# Altium PCB NanoEEG_v2_MCU.PcbDoc (part 1 of 2)
Units mil, origin at the board's own origin, x right, y up, seen from the top; angles counter-clockwise.
Board outline 2598.43 x 2047.24 mil, 4 copper layers (Top Layer, Gound Plane 1, Power Layer 1, Bottom Layer), stack 73.627 mil thick; 74 components, 82 nets, 371 pads, 188 vias.
Unrouted connection lines stored in the file: 22.
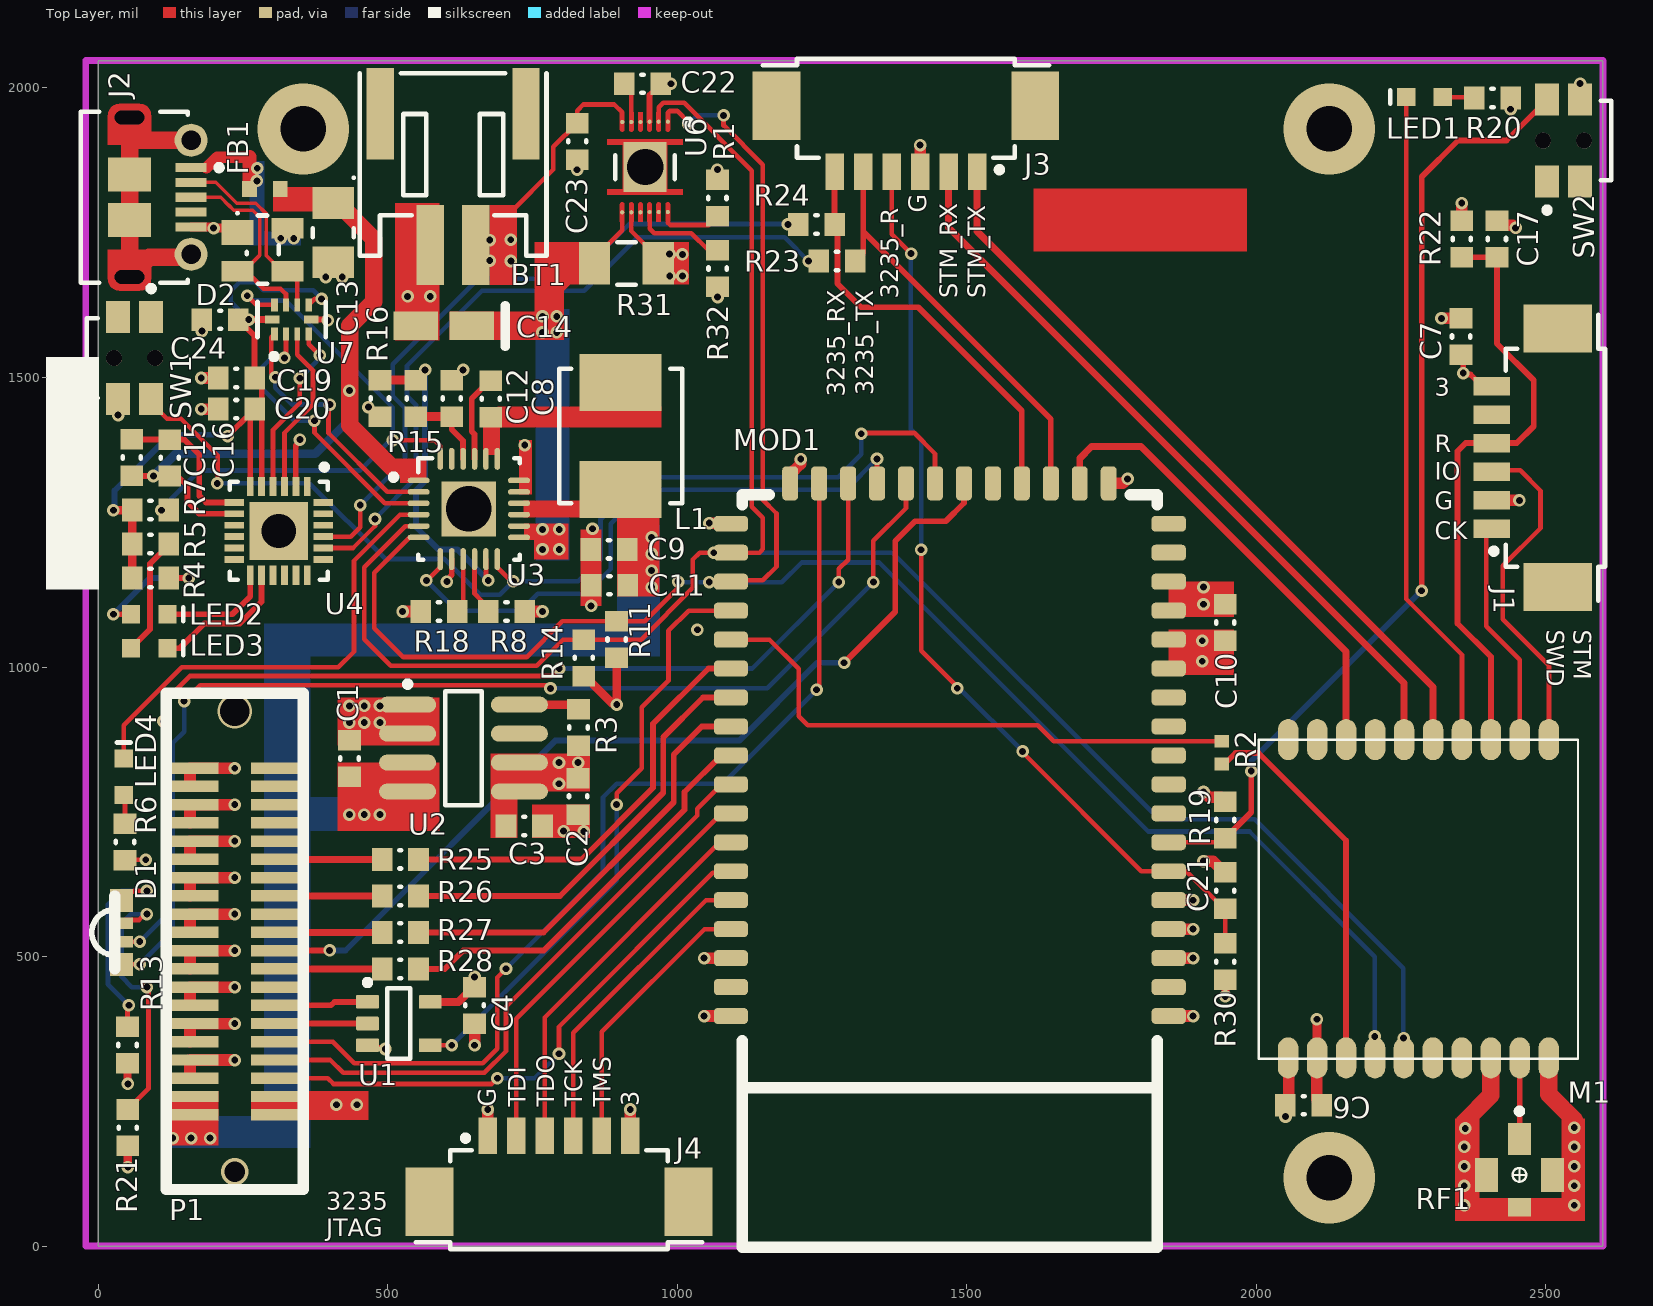
[diagram p0: Top Layer view]
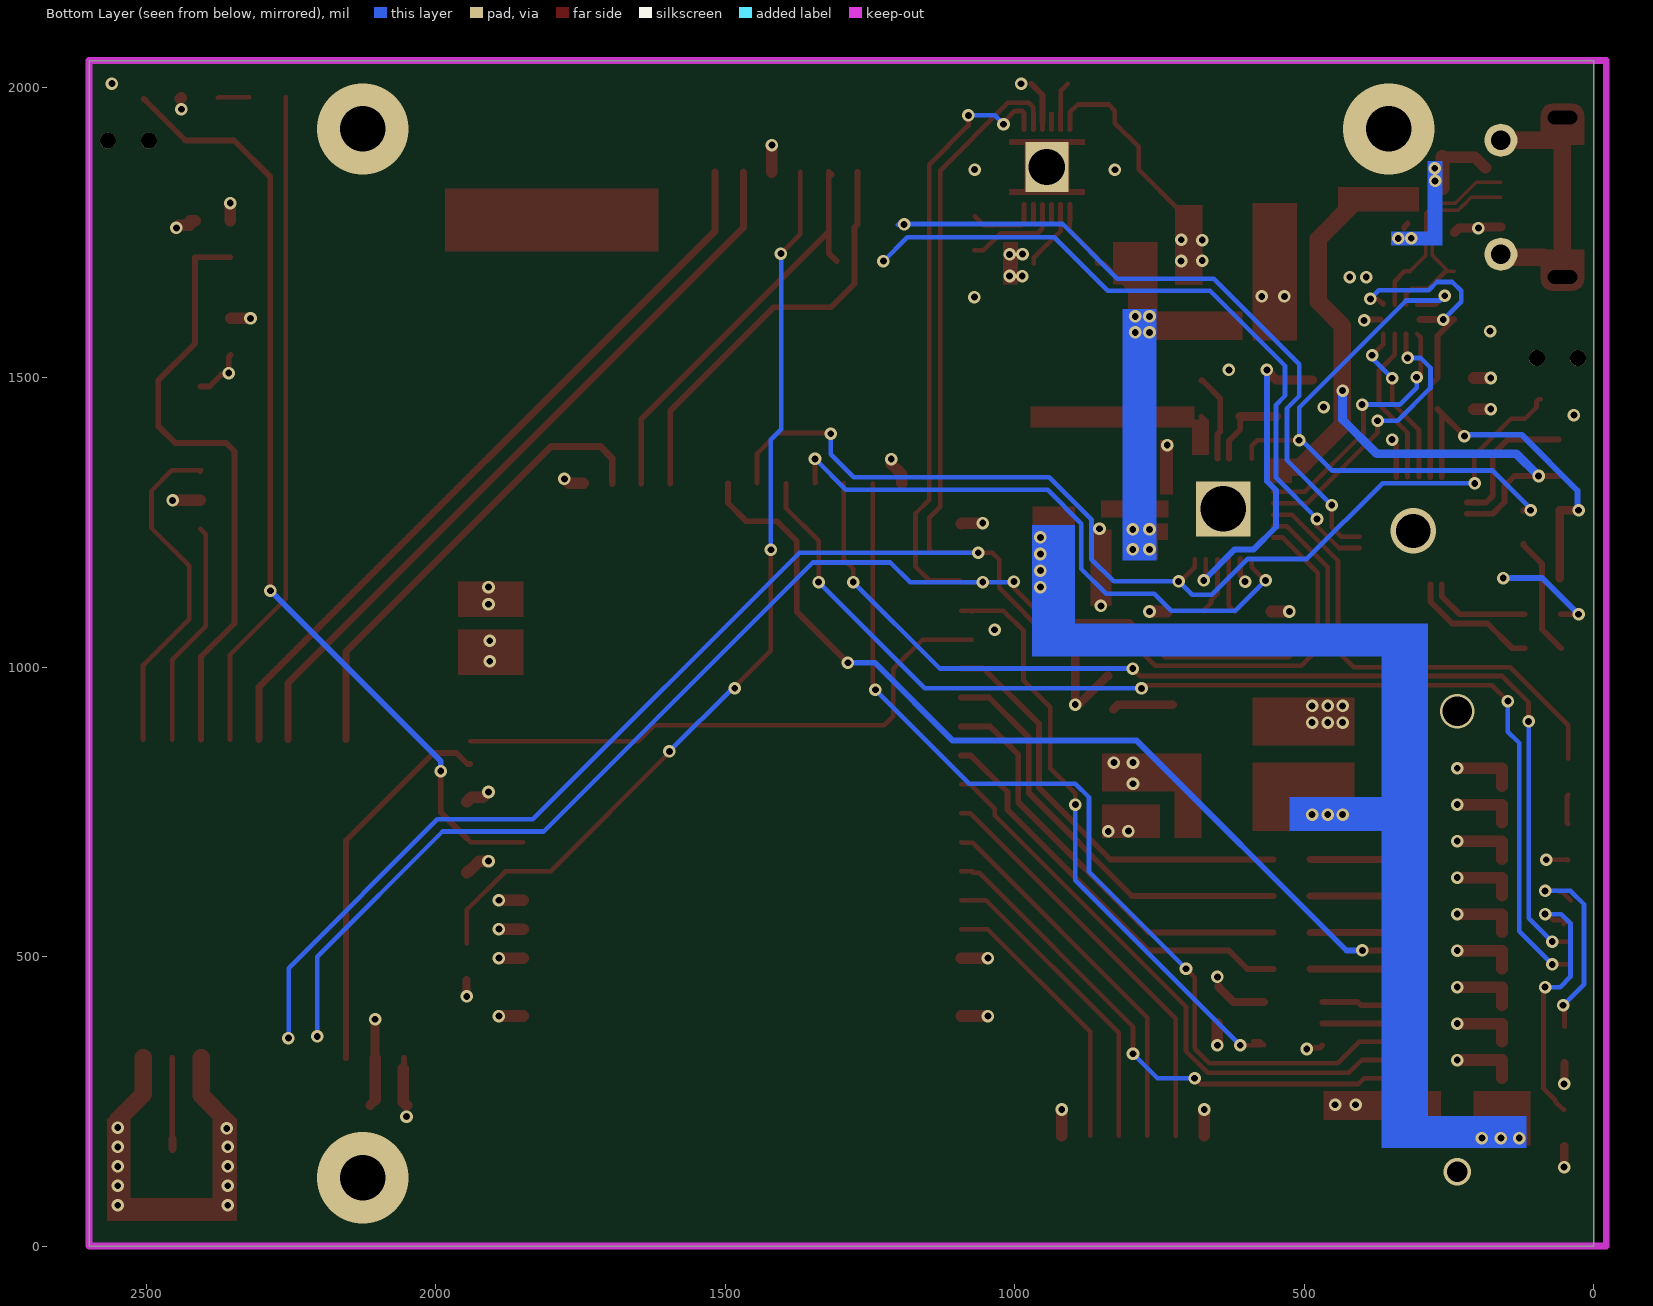
[diagram p1: Bottom Layer view, seen from below]
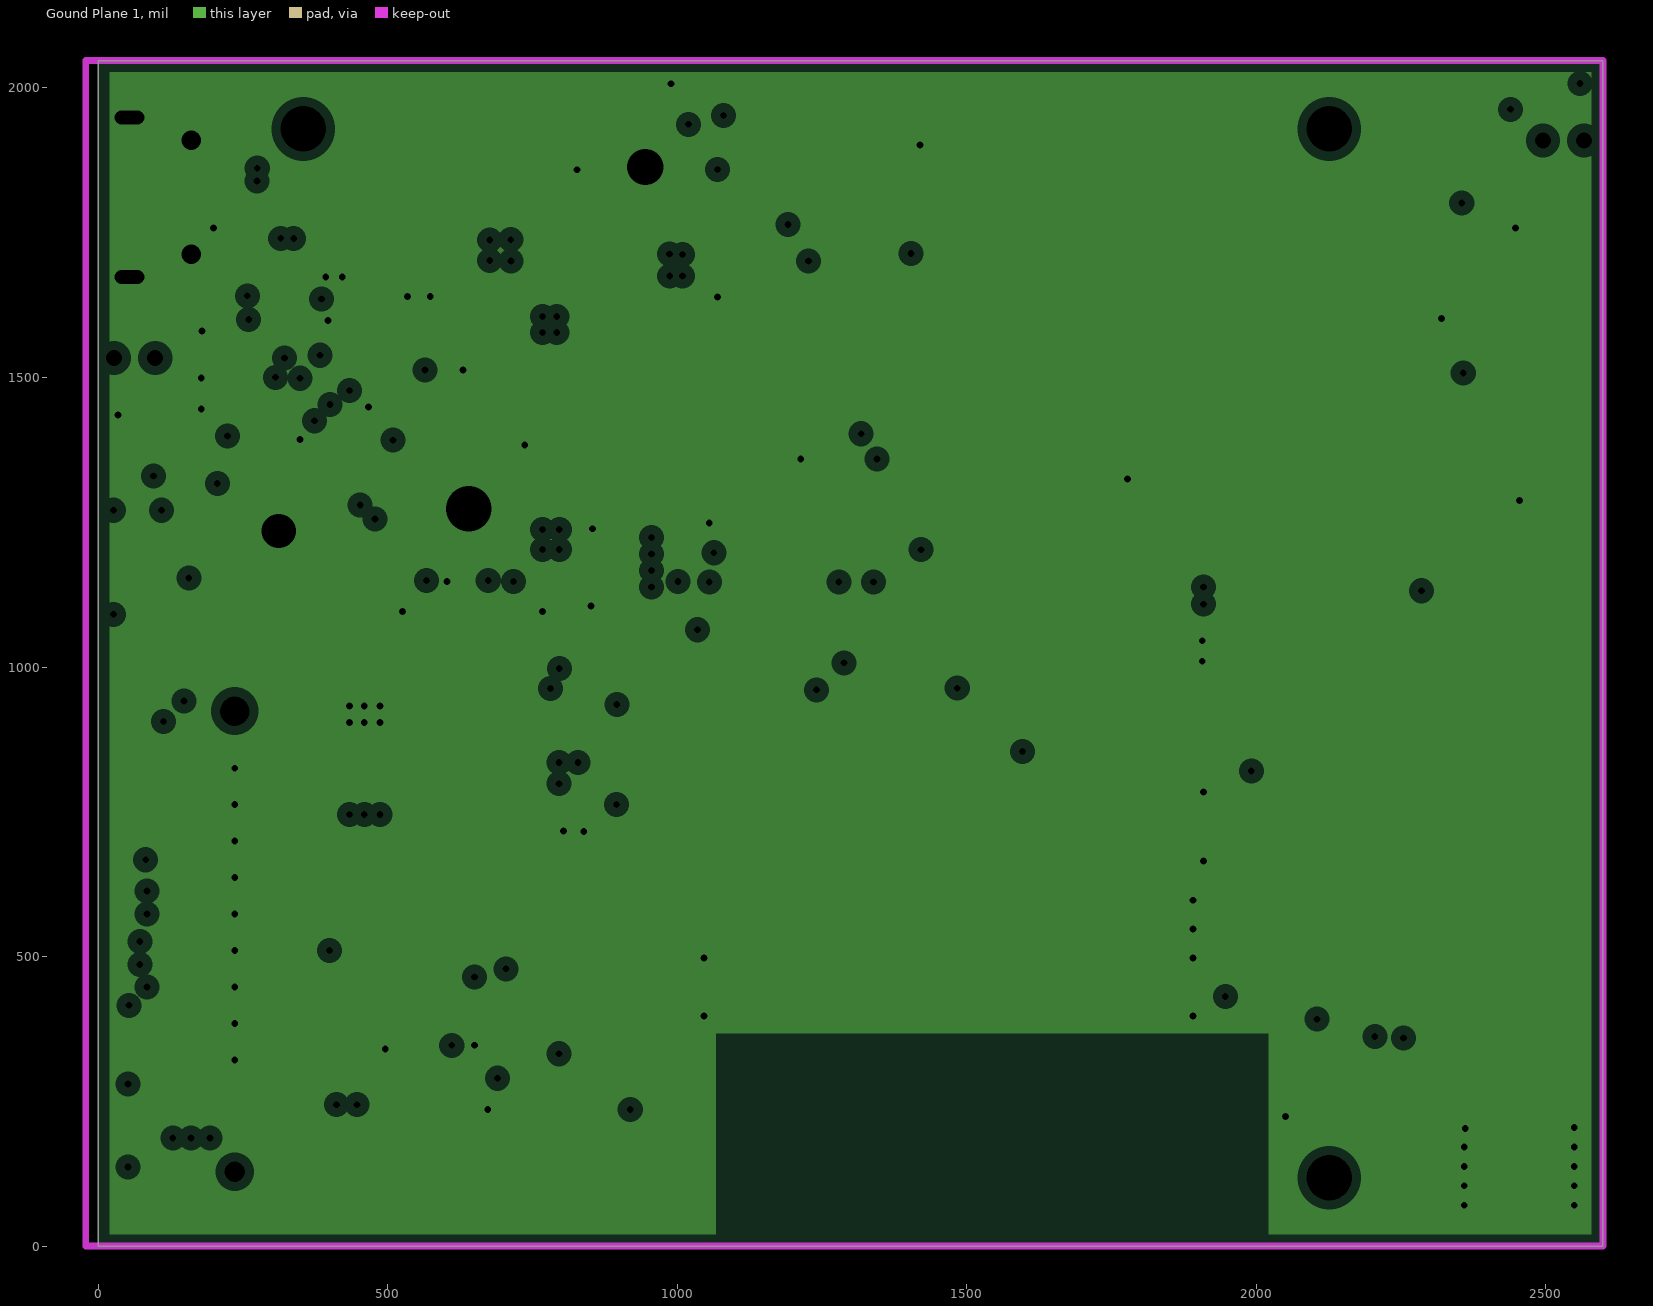
[diagram p2: Gound Plane 1, clearances drawn from the general rule]
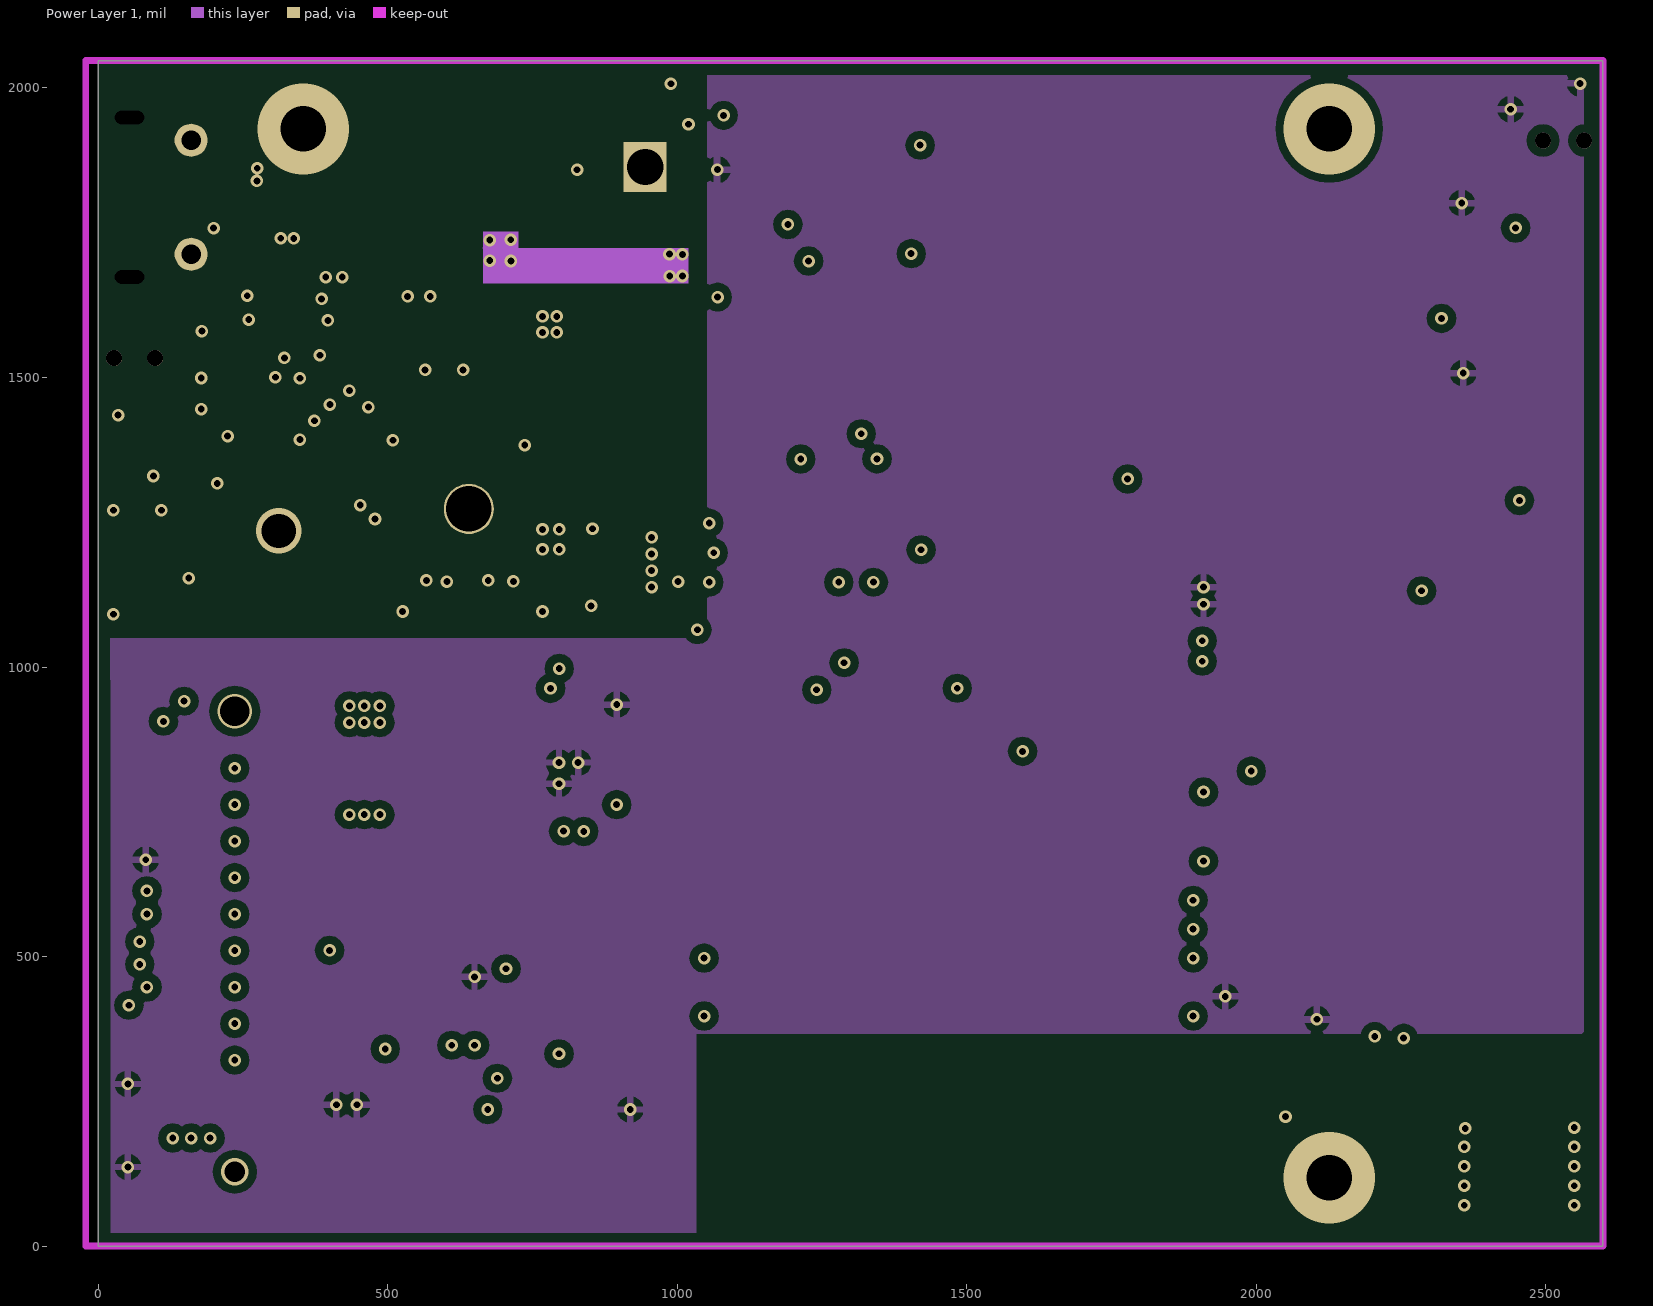
[diagram p3: Power Layer 1]

## Layer stack, top to bottom
Top Solder: solder mask 0.4, Solder Resist, Dk 3.5
Top Layer: signal copper 1.4
Dielectric1: core 31.4961, FR-4, Dk 4.8
Gound Plane 1: plane copper 1.4173, net GND
Dielectric 3: prepreg 5, Dk 4.2
Power Layer 1: signal copper 1.4173
Dielectric 2: core 31.4961, FR-4, Dk 4.2
Bottom Layer: signal copper 1.4
Bottom Solder: solder mask 0.4, Solder Resist, Dk 3.5

## Board outline
0,0 0,2047.24 2598.43,2047.24 2598.43,0.02

## Design rules (kind name [scope] priority, off if disabled: settings)
Clearance Clearance_1 [InPolygon] p1: gap=14 ignorepadtopadclearanceinfootprint=FALSE except(0: Arc-Hole Track-Hole SMDPad-Hole THPad-Hole Via-Hole Fill-Hole Poly-Hole Region-Hole Text-Hole)
Clearance [All] p2: gap=6 ignorepadtopadclearanceinfootprint=FALSE except(0: Arc-Hole Track-Hole SMDPad-Hole THPad-Hole Via-Hole Fill-Hole Poly-Hole Region-Hole Text-Hole)
FabricationTestPointUsage TestPointUsage [All] p1: valid=0 allowmultiple=FALSE
FabricationTestpoint Testpoint [(IsPad And (OnTopLayer Or OnBottomLayer))] p1: side=3 testpointundercomponent=TRUE minsize=40 maxsize=100 preferedsize=60 minholesize=0 maxholesize=40 preferedholesize=32 testpointgrid=1 allowsidetop=TRUE allowsidebottom=TRUE usegrid=TRUE gridtolerance=0.01
HoleSize [All] p1: absolutevalues=TRUE maxlimit=787.4 minlimit=11.81 maxpercent=80.000 minpercent=20.000
HoleToHoleClearance [All] p1: gap=0 allowstackedmicrovias=TRUE
MinimumSolderMaskSliver [All] p1: minsoldermaskwidth=0
PlaneClearance [All] p1: clearance=15.75
PlaneConnect [All] p1: planeconnectstyle=Direct reliefexpansion=11.81 reliefentries=4 reliefconductorwidth=11.81 reliefairgap=11.81
PolygonConnect [All] p1: connectstyle=Relief reliefconductorwidth=11.81 reliefentries=4 polygonreliefangle="90 Angle" airgapwidth=11.81
RoutingVias [All] p1: holewidth=19.68 width=51.18 viastyle="Through Hole" minholewidth=11.81 minwidth=19.68 maxholewidth=393.7 maxwidth=787.4
SilkToSilkClearance [All] p1: silktosilkclearance=0
SilkToSolderMaskClearance SilkscreenOverComponentPads [IsPad] p1: minsilkscreentomaskgap=0 clearancetoexposedcopper=TRUE
SolderMaskExpansion [All] p1: expansion=2 istentingtop=FALSE
Width [All] p1: maxlimit=200 minlimit=6 preferedwidth=10
21 further rules are at their usual default settings.

## Classes and differential pairs
component class NanoEEG_v3: BT1 D1 J1 J3 J4 M1 MOD1 P1 RF1 U3 U4 U6
component class NanoEEG_v2_MCU: BT1 D1 J1 J3 J4 L2 M1 MOD1 P1 R19 RF1 SW2 U3 U4 U6

## Components (designator, comment, footprint, x,y, rotation, side; value= is the part's Value field where it differs from the comment)
BT1 "Battery" PH2.0-WS-2P 613.16,1954.92 r180 top locked
C1 "CAP 10uF 6.3V" CAPC0603(1608)100_N 434.21,842.11 r270 top value=10uF
C2 "CAP 10uF 6.3V" CAPC0603(1608)100_N 829,776.74 r90 top value=10uF
C3 "CAP 100nF 6.3V" CAPC0603(1608)100_N 736,725.32 r180 top value=100nF
C4 "CAP 100nF 6.3V" CAPC0603(1608)100_N 650.17,415.86 r90 top value=100nF
C6 "CAP 100nF 6.3V" CAPC0603(1608)100_N 2081.92,243.35 r0 top value=100nF
C7 "CAP 100nF 6.3V" CAPC0603(1608)100_N 2353.74,1570.41 r270 top value=100nF
C8 "CAP 47nF" CAPC0603(1608)100_N 678.08,1463.09 r270 top value=47nF
C9 "CAP 10uF" CAPC0603(1608)100_N 882.08,1203.15 r0 top value=10uF
C10 "1uF" CAPC0603(1608)100_N 1946.54,1076.74 r90 top value=100nF
C11 "CAP 10uF" CAPC0603(1608)100_N 882.98,1141.07 r0 top value=10uF
C12 "CAP 4.7uF 10V 0603(1608)" CAPC0603(1608)55_N 610.8,1463.92 r90 top value=4.7uF
C13 "TAJA106K016RNJ" CAPMP3217X18-T_V 406.21,1750.11 r270 top
C14 "T491A106K016AT" KEMT-A-3216-18-2_N 596.97,1588.99 r180 top
C15 "CAP 100nF 6.3V" CAPC0603(1608)100_N 58.11,1361.65 r90 top value=100nF
C16 "CAP 4.7uF 6.3V" CAPC0603(1608)100_N 124.05,1361.29 r90 top value=4.7uF
C17 "CAP 1uF 25V 0603(1608)" CAPC0603(1608)100_N 2415.41,1738.93 r270 top value=1uF
C19 "CAP 100nF 6.3V" CAPC0603(1608)100_N 238.81,1499.01 r0 top value=100nF
C20 "CAP 4.7uF 6.3V" CAPC0603(1608)100_N 238.81,1445.28 r0 top value=4.7uF
C21 "CAP 1uF 25V" CAPC0603(1608)100_N 1946.54,613.71 r270 top value=1uF
C22 "CAP 470nF 10V" CAPC0603(1608)100_N 940.06,2007.04 r180 top value=470nF
C23 "CAP 1uF 10V" CAPC0603(1608)100_N 827.36,1907.74 r90 top value=1uF
C24 "CAP 100nF 6.3V" CAPC0603(1608)100_N 211,1599.75 r0 top value=100nF
D1 "Bi-Color LED" LED_Bi_Color_1204 28.6,541.66 r180 top
D2 "SP0503BAHTG" LFUS-SOT143-4_V 284.16,1720.58 r0 top
FB1 "BLM18PG600SN1J" MURA-BLM18PG_KG-CHIP-2_V2 288.16,1825.7 r180 top
J1 "Header 6" GH-1.25-WS-6P 2516.51,1361.4 r90 top locked
J2 "105017-0001" USB-MICRO-B_V 107.66,1811.13 r270 top
J3 "Header 6" GH-1.25-WS-6P 1395,1965 r180 top locked
J4 "Header 6" GH-1.25-WS-6P 796,80.3 r0 top locked
L1 "ETQ-P3M2R2YFP" FP-PCC-M0530M-MFG 902.46,1398.81 r270 top value=2.2uH
LED1 "150060BS75000" 0603_A 2290.64,1984.05 r0 top
LED2 "150060BS75000" 0603_A 88.43,1091 r180 top
LED3 "150060BS75000" 0603_A 88.43,1032.31 r180 top
LED4 "150060BS75000" 0603_A 44.67,810.61 r270 top locked
M1 "CC1310-Module (Silicontrac)" CC1310ZTR4-GC 2555.32,325.61 r180 top
MOD1 "TA3235S_UA_MOD" TA_3235S_UA_MOD 1829.07,1247.36 r180 top locked
P1 "Header 20X2" FCI-B2B-0.8mm-40p-MALE 158.86,226.89 r270 top locked
R1 "10K 1%" RESC0603(1608)_N 1069.52,1809.57 r270 top value="10000.00 Ohm"
R2 "1K 5% 0402" RESC0402(1005)_N 1940.26,852.23 r90 top value="1000.00 Ohm"
R3 "249K 1%" RESC0603(1608)_N 829.76,895.7 r270 top value="249000.00 Ohm"
R4 "1K 1%" RESC0603(1608)_N 90.4,1153.63 r180 top value="1000.00 Ohm"
R5 "1K 1%" RESC0603(1608)_N 90.4,1212.33 r180 top value="1000.00 Ohm"
R6 "1K 1%" RESC0603(1608)_N 46.63,698.05 r270 top value="1000.00 Ohm"
R7 "1K 1%" RESC0603(1608)_N 90.4,1271.02 r0 top value="1000.00 Ohm"
R8 "260" RESC0603(1608)_N 705.29,1095.87 r180 top value="10500.00 Ohm"
R11 "4K7 1% 0603(1608)" RESC0603(1608)_N 895.53,1047.36 r90 top value="4700.00 Ohm"
R13 "1K 1%" RESC0603(1608)_N 50.84,347.38 r90 top value="1000.00 Ohm"
R14 "4K7 1% 0603(1608)" RESC0603(1608)_N 838.67,1015.86 r90 top value="4700.00 Ohm"
R15 "10K" RESC0603(1608)_N 548.74,1463.92 r90 top value="10500.00 Ohm"
R16 "10K" RESC0603(1608)_N 486.68,1463.92 r270 top value="10500.00 Ohm"
R18 "10K" RESC0603(1608)_N 588.98,1095.87 r180 top value="10500.00 Ohm"
R19 "10K 1% 0603(1608)" RESC0603(1608)_N 1946.54,735.74 r270 top value="10000.00 Ohm"
R20 "1K 1%" RESC0603(1608)_N 2407.75,1982.64 r0 top value="1000.00 Ohm"
R21 "1K 1%" RESC0603(1608)_N 51.34,204.46 r90 top value="1000.00 Ohm"
R22 "10K 1% 0603(1608)" RESC0603(1608)_N 2354.81,1738.93 r90 top value="10000.00 Ohm"
R23 "Jumper" RESC0603(1608)_N 1276.21,1700.99 r180 top value="0.00 Ohm"
R24 "Jumper" RESC0603(1608)_N 1240.45,1764.12 r180 top value="0.00 Ohm"
R25 "100R 1%" RESC0603(1608)_N 521.93,667.83 r180 top value="100.00 Ohm"
R26 "100R 1%" RESC0603(1608)_N 521.93,604.74 r180 top value="100.00 Ohm"
R27 "100R 1%" RESC0603(1608)_N 521.93,541.66 r180 top value="100.00 Ohm"
R28 "100R 1%" RESC0603(1608)_N 521.93,478.57 r180 top value="100.00 Ohm"
R30 "10K 1%" RESC0603(1608)_N 1946.54,491.2 r270 top value="10000.00 Ohm"
R31 "WSLP1206R0100FEA" FP-WSLP1206-FP_1_65x1_93x-IPC_B 912.33,1696.84 r180 top
R32 "10K 1%" RESC0603(1608)_N 1069.94,1687.9 r270 top value="10000.00 Ohm"
RF1 "RECE-20369-001E-01" IPEX_MHF_I 2454.39,122.98 r180 top
SW1 "EVQ-P7D01K" FP-EVQ-P7D01K-MFG 63.25,1533.37 r270 top
SW2 "EVQ-P7D01K" FP-EVQ-P7D01K-MFG 2530.6,1909.06 r90 top
U1 "SN74AHC1G32DBVR" DBV0005A_N 519.48,384.37 r0 top
U2 "TPS76833QDG4" TI-D8_M 631.12,860.03 r0 top
U3 "BQ25895RTWR" RTW0024H 640.33,1272.92 r0 top value=Value
U4 "CP2102N-A01-GQFN24" SLAB-QFN-24-2550X2550TP_A_V 312.1,1235 r270 top
U6 "BQ27441DRZR-G1A" FP-DRZ0012A-MFG_M 944.53,1863.35 r180 top
U7 "TS3USB3000RSER" FP-TS3USB3000RSER-MFG 334.43,1600.12 r90 top

## Footprints (in the part's own frame and the unit in brackets; to place one, negate y for a bottom-side part, rotate by r counter-clockwise, add the part's x,y. Pads: shape width x height; smd on the part's side, far side on the other; paste and mask are expansions set on the pad)
0603_A [mm] "Chip LED, 2-Leads, Body 1.6x0.8mm, IPC Medium Density"
  rect 0.8x0.8 smd: 1(-0.8,0) 2(0.8,0)
  silkscreen extent -1.5,-0.3 -1.5,0.3, body extent -0.8,-0.4 0.8,0.4, height 0.7
CAPC0603(1608)55_N [mm] "Chip Capacitor, Body 1.6x0.8mm, Height 0.55mm, IPC Medium Density"
  rect 0.9x1 smd: 1(-0.8,0) 2(0.8,0)
  silkscreen extent -0.05,-0.4 0.05,0.4, body extent -0.87,-0.48 0.88,0.47, height 0.55
CAPC0603(1608)100_N [mm] "Chip Capacitor, Body 1.6x0.8mm, Height 1.0mm, IPC Medium Density"
  rect 0.9x1 smd: 1(-0.8,0) 2(0.8,0)
  silkscreen extent -0.05,-0.4 0.05,0.4, body extent -0.87,-0.48 0.88,0.47, height 1
CAPMP3217X18-T_V [mm] "Molded Capacitor, 2-Leads, Body 3.40x1.8mm"
  rect 1.4x1.8 smd: 1(-1.3,0) 2(1.3,0)
  silkscreen extent -2.45,-0.9 0.2,0.95, body extent -1.92,-0.9 1.92,0.9, height 1.8
CC1310ZTR4-GC [mm]
  oval 0.9x1.8 smd: 1(1.27,-13.945) 2(2.544,-13.945) 3(3.814,-13.945) 4(5.084,-13.945) 5(6.354,-13.945) 6(7.624,-13.945) 7(8.894,-13.945) 8(10.164,-13.945) 9(11.434,-13.945) 10(12.704,-13.945) 11(12.708,0.015) 12(11.438,0.015) 13(10.168,0.015) 14(8.898,0.015) 15(7.628,0.015) 16(6.358,0.015) 17(5.088,0.015) 18(3.818,0.015) 19(2.548,0.015) 20(1.28,0.015)
  silkscreen extent 0,-13.94 14,0.06
DBV0005A_N [mm] "SOT23, 5-Leads, Body 3.05x1.75mm, Pitch 0.95mm, IPC Medium Density"
  rrect17% 1x0.6 smd: 1(-1.375,0.95) 2(-1.375,0) 3(-1.375,-0.95) 4(1.375,-0.95) 5(1.375,0.95)
  silkscreen extent -1.5,-1.55 0.5,1.92, body extent -1.42,-1.46 1.42,1.46, height 1.08
FCI-B2B-0.8mm-40p-MALE [mm]
  rect 0.5x2.5 smd: 1(0,0) 1(0,0) 2(0,3.93) 2(0,3.93) 3(-0.8,0) 4(-0.8,3.93) 5(-1.6,0) 6(-1.6,3.93) 7(-2.4,0) 8(-2.4,3.93) 9(-3.2,0) 10(-3.2,3.93) 11(-4,0) 12(-4,3.93) 13(-4.8,0) 14(-4.8,3.93) 15(-5.6,0) 16(-5.6,3.93) 17(-6.4,0) 18(-6.4,3.93) 19(-7.2,0) 20(-7.2,3.93) 21(-8,0) 22(-8,3.93) 23(-8.8,0) 24(-8.8,3.93) 25(-9.6,0) 26(-9.6,3.93) 27(-10.4,0) 28(-10.4,3.93) 29(-11.2,0) 30(-11.2,3.93) 31(-12,0) 32(-12,3.93) 33(-12.8,0) 34(-12.8,3.93) 35(-13.6,0) 36(-13.6,3.93) 37(-14.4,0) 38(-14.4,3.93) 39(-15.2,0) 40(-15.2,3.93)
  silkscreen extent -18.48,-1.03 3.28,4.96, body extent -18.5,-1.03 3.3,4.96, height 5.6
FP-DRZ0012A-MFG_M [mm]
  round 0.18 smd paste-1000 mask+0: 1(-1,-1.985) 2(-0.6,-1.985) 3(-0.2,-1.985) 4(0.2,-1.975) 5(0.6,-1.975) 6(1,-1.975) 7(1,1.985) 8(0.6,1.985) 9(0.2,1.985) 10(-0.2,1.975) 11(-0.6,1.975) 12(-1,1.975)
  rect 1.9x2.2 hole 1.6 paste-1000 mask+0: 13(0,0)
  Top Layer region: -1.1,-2.4 -1.1,-1.65 -1.092,-1.612 -1.071,-1.579 -1.038,-1.558 -1,-1.55 -1,-1.55 -0.962,-1.558 -0.929,-1.579 -0.908,-1.612 -0.9,-1.65 -0.9,-1.65 -0.9,-2.4
  Top Layer region: -0.7,-2.4 -0.7,-1.65 -0.692,-1.612 -0.671,-1.579 -0.638,-1.558 -0.6,-1.55 -0.6,-1.55 -0.562,-1.558 -0.529,-1.579 -0.508,-1.612 -0.5,-1.65 -0.5,-1.65 -0.5,-2.4
  Top Layer region: -0.3,-2.4 -0.3,-1.65 -0.292,-1.612 -0.271,-1.579 -0.238,-1.558 -0.2,-1.55 -0.2,-1.55 -0.162,-1.558 -0.129,-1.579 -0.108,-1.612 -0.1,-1.65 -0.1,-1.65 -0.1,-2.4
  Top Layer region: 0.1,-2.4 0.1,-1.65 0.108,-1.612 0.129,-1.579 0.162,-1.558 0.2,-1.55 0.2,-1.55 0.238,-1.558 0.271,-1.579 0.292,-1.612 0.3,-1.65 0.3,-1.65 0.3,-2.4
  Top Layer region: 0.5,-2.4 0.5,-1.65 0.508,-1.612 0.529,-1.579 0.562,-1.558 0.6,-1.55 0.6,-1.55 0.638,-1.558 0.671,-1.579 0.692,-1.612 0.7,-1.65 0.7,-1.65 0.7,-2.4
  Top Layer region: 0.9,-2.4 0.9,-1.65 0.908,-1.612 0.929,-1.579 0.962,-1.558 1,-1.55 1,-1.55 1.038,-1.558 1.071,-1.579 1.092,-1.612 1.1,-1.65 1.1,-1.65 1.1,-2.4
  Top Layer region: 1.1,2.4 1.1,1.65 1.087,1.6 1.05,1.563 1,1.55 1,1.55 0.962,1.558 0.929,1.579 0.908,1.612 0.9,1.65 0.9,1.65 0.9,2.4
  Top Layer region: 0.7,2.4 0.7,1.65 0.692,1.612 0.671,1.579 0.638,1.558 0.6,1.55 0.6,1.55 0.562,1.558 0.529,1.579 0.508,1.612 0.5,1.65 0.5,1.65 0.5,2.4
  Top Layer region: 0.3,2.4 0.3,1.65 0.292,1.612 0.271,1.579 0.238,1.558 0.2,1.55 0.2,1.55 0.162,1.558 0.129,1.579 0.108,1.612 0.1,1.65 0.1,1.65 0.1,2.4
  Top Layer region: -0.1,2.4 -0.1,1.65 -0.108,1.612 -0.129,1.579 -0.162,1.558 -0.2,1.55 -0.2,1.55 -0.238,1.558 -0.271,1.579 -0.292,1.612 -0.3,1.65 -0.3,1.65 -0.3,2.4
  Top Layer region: -0.5,2.4 -0.5,1.65 -0.508,1.612 -0.529,1.579 -0.562,1.558 -0.6,1.55 -0.6,1.55 -0.638,1.558 -0.671,1.579 -0.692,1.612 -0.7,1.65 -0.7,1.65 -0.7,2.4
  Top Layer region: -0.9,2.4 -0.9,1.65 -0.908,1.612 -0.929,1.579 -0.962,1.558 -1,1.55 -1,1.55 -1.038,1.558 -1.071,1.579 -1.092,1.612 -1.1,1.65 -1.1,1.65 -1.1,2.4
  Top Layer region: -1.65,1.225 1.65,1.225 1.65,0.975 0.975,0.975 0.975,-0.975 1.65,-0.975 1.65,-1.225 -1.65,-1.225 -1.65,-0.975 -0.975,-0.975 -0.975,0.975 -1.65,0.975 -1.65,1.225
  silkscreen extent -2.02,-2.1 1.3,0.53, body extent -1.75,-2.5 1.75,2.5, height 0.25
FP-EVQ-P7D01K-MFG [mm]
  rect 1.4x1.05 smd paste+0 mask+0: 1(-1.8,0.725) 1'(1.8,0.725) 2(-1.8,-0.725) 2'(1.8,-0.725)
  round 0.7 hole 0.7 unplated paste-1000 mask+0: ""(0,0.9) ""(0,-0.9)
  silkscreen extent -3.17,-2.1 1.75,0.85, body extent -2.6,-2.2 2.6,1.55, height 0.25
FP-PCC-M0530M-MFG [mm]
  rect 2.5x3.6 smd paste+0 mask+0: 1(-2.35,0) 2(2.35,0)
  silkscreen extent -2.95,-2.7 2.95,2.7, body extent -3.7,-2.8 3.7,2.8, height 0.25
FP-TS3USB3000RSER-MFG [mm]
  rect 0.575x0.3 smd paste-1000 mask+0: 1(-0.637,0.75) 4(-0.637,-0.75) 6(0.637,-0.75) 9(0.637,0.75)
  rect 0.575x0.25 smd paste-1000 mask+0: 2(-0.637,0.25) 3(-0.637,-0.25) 7(0.637,-0.25) 8(0.637,0.25)
  rect 0.35x0.63 smd paste-1000 mask+0: 5(0,-0.86) 10(0,0.86)
  silkscreen extent -1.75,-1.5 0.77,1.5, body extent -1.02,-1.28 1.02,1.28, height 0.25
FP-WSLP1206-FP_1_65x1_93x-IPC_B [mil]
  rect 53.93x73.18 smd paste+0 mask+0: 1(-54.9,0) 2(54.9,0)
  silkscreen extent -16,-37 16,37, body extent -92,-46 92,46, height 10
GH-1.25-WS-6P [mm]
  rect 0.81x1.6 smd: 1(-3.125,2.8) 2(-1.875,2.8) 3(-0.625,2.8) 4(0.625,2.8) 5(1.875,2.8) 6(3.125,2.8)
  rect 2.1x3 smd: MP1(-5.675,-0.1) MP2(5.675,-0.1)
  silkscreen extent -6.27,-2.17 6.27,2.82, body extent -6.13,-2.1 6.13,3.3, height 3.4
IPEX_MHF_I [mm]
  rect 1x1.4 smd: 1(0,-1.575)
  rect 1x1.5 smd: 2(1.448,0) 3(-1.448,0)
  rect 1x0.8 smd: 4(0,1.422)
  silkscreen extent -0.3,-2.92 0.3,0.3, body extent -0.85,-0.85 0.85,0.85, height 0.85
KEMT-A-3216-18-2_N [mm] "Molded TAN Capacitor, 2-Leads, Body 3.4x1.8mm, IPC Medium Density"
  rect 1.95x1.25 smd: 1(-1.225,0) 2(1.225,0)
  silkscreen extent -2.7,-0.9 -2.7,0.9, body extent -1.7,-0.9 1.7,0.9, height 1.8
LED_Bi_Color_1204 [mm]
  rect 1x0.5 smd: 1(-0.3,0.4) 2(-0.3,-0.4)
  rect 1x1 smd: 3(-0.3,1.4) 4(-0.3,-1.4)
  silkscreen extent 0,-1.6 1,1.6, body extent -0.25,-1.6 1,1.6, height 1
LFUS-SOT143-4_V [mm] "SOT143, 4-Leads, Body 3.04x1.4mm, Pitch 1.90mm"
  rect 1.4x1.1 smd: 1(-1.1,0.75)
  rect 1.4x0.9 smd: 2(-1.1,-0.95) 3(1.1,-0.95) 4(1.1,0.95)
  silkscreen extent -1.15,-1.5 0.7,1.65, body extent -0.7,-1.52 0.7,1.52, height 1.22
MURA-BLM18PG_KG-CHIP-2_V2 [mm] "Chip Ferrite Bead, 2-Leads, Body 1.6x0.8mm, Height 0.95mm, Reflow, 0.5 to 1.5A Rated Current"
  rect 0.65x0.7 smd: 1(-0.675,0) 2(0.675,0)
  body extent -0.8,-0.4 0.8,0.4, height 0.95
PH2.0-WS-2P [mm] "长：8mm，宽：7.6mm，高：5.5mm"
  rect 1.2x4 smd: 0(-3.2,-0.006) 0(3.2,-0.006)
  rect 1.2x3.5 smd: 1(-1,5.744) 2(1,5.744)
  silkscreen extent -4.1,-1.78 4.1,6.22, body extent -4,-1.65 4,6.95, height 5.55
RESC0402(1005)_N [mm] "Chip Resistor, Body 1.0x0.5mm, IPC Medium Density"
  rect 0.55x0.65 smd: 1(-0.5,0) 2(0.5,0)
  body extent -0.52,-0.27 0.53,0.28, height 0.4
RESC0603(1608)_N [mm] "Chip Resistor, Body 1.6x0.8mm, IPC Medium Density"
  rect 0.9x1 smd: 1(-0.8,0) 2(0.8,0)
  silkscreen extent -0.05,-0.4 0.05,0.4, body extent -0.85,-0.47 0.85,0.47, height 0.6
RTW0024H [mm]
  oval 0.965x0.24 smd paste+0 mask+0.051: 1(-2.2,1.25) 2(-2.2,0.75) 3(-2.2,0.25) 4(-2.2,-0.25) 5(-2.2,-0.75) 6(-2.2,-1.25) 13(2.2,-1.25) 14(2.2,-0.75) 15(2.2,-0.25) 16(2.2,0.25) 17(2.2,0.75) 18(2.2,1.25)
  oval 0.24x0.965 smd paste+0 mask+0.051: 7(-1.25,-2.2) 8(-0.75,-2.2) 9(-0.25,-2.2) 10(0.25,-2.2) 11(0.75,-2.2) 12(1.25,-2.2) 19(1.25,2.2) 20(0.75,2.2) 21(0.25,2.2) 22(-0.25,2.2) 23(-0.75,2.2) 24(-1.25,2.2)
  round 2.2 hole 2: 25(0,0)
  rect 2.4x2.4 smd paste-1.337 mask+0.051: 25(0,0)
  rect 2.4x2.4 smd far side paste-1.337 mask+0.051: 25(0,0)
  silkscreen extent -3.43,-2.22 2.22,2.22, body extent -1.84,-1.84 1.84,1.84, height 0.8
SLAB-QFN-24-2550X2550TP_A_V [mm] "QFN, 6-Leads, Body 4x4mm, Pitch 0.5mm, Thermal Pad 2.55x2.55mm"
  rect 0.85x0.3 smd: 1(-1.95,1.25) 2(-1.95,0.75) 3(-1.95,0.25) 4(-1.95,-0.25) 5(-1.95,-0.75) 6(-1.95,-1.25) 13(1.95,-1.25) 14(1.95,-0.75) 15(1.95,-0.25) 16(1.95,0.25) 17(1.95,0.75) 18(1.95,1.25)
  rect 0.3x0.85 smd: 7(-1.25,-1.95) 8(-0.75,-1.95) 9(-0.25,-1.95) 10(0.25,-1.95) 11(0.75,-1.95) 12(1.25,-1.95) 19(1.25,1.95) 20(0.75,1.95) 21(0.25,1.95) 22(-0.25,1.95) 23(-0.75,1.95) 24(-1.25,1.95)
  rect 2.55x2.55 smd: 25(0,0)
  silkscreen extent -2.92,-2.15 2.15,2.15, body extent -2,-2 2,2, height 0.8
TA_3235S_UA_MOD [mm]
  rrect50% 1.5x0.7 smd: 1(-0.5,21.59) 2(-0.5,20.32) 3(-0.5,19.05) 4(-0.5,17.78) 5(-0.5,16.51) 6(-0.5,15.24) 7(-0.5,13.97) 8(-0.5,12.7) 9(-0.5,11.43) 10(-0.5,10.16) 11(-0.5,8.89) 12(-0.5,7.62) 13(-0.5,6.35) 14(-0.5,5.08) 15(-0.5,3.81) 16(-0.5,2.54) 17(-0.5,1.27) 18(-0.5,0) 31(18.7,0) 32(18.7,1.27) 33(18.7,2.54) 34(18.7,3.81) 35(18.7,5.08) 36(18.7,6.35) 37(18.7,7.62) 38(18.7,8.89) 39(18.7,10.16) 40(18.7,11.43) 41(18.7,12.7) 42(18.7,13.97) 43(18.7,15.24) 44(18.7,16.51) 45(18.7,17.78) 46(18.7,19.05) 47(18.7,20.32) 48(18.7,21.59)
  rrect50% 0.7x1.5 smd: 19(2.13,-1.77) 20(3.4,-1.77) 21(4.67,-1.77) 22(5.94,-1.77) 23(7.21,-1.77) 24(8.48,-1.77) 25(9.75,-1.77) 26(11.02,-1.77) 27(12.29,-1.77) 28(13.56,-1.77) 29(14.83,-1.77) 30(16.1,-1.77)
  silkscreen extent 0,-1.27 18.2,31.73
TI-D8_M [mm] "SOIC, 8-Leads, Body 4.9x3.9mm, Pitch 1.27mm, IPC Low Density"
  oval 2.5x0.7 smd: 1(-2.45,1.905) 2(-2.45,0.635) 3(-2.45,-0.635) 4(-2.45,-1.905) 5(2.45,-1.905) 6(2.45,-0.635) 7(2.45,0.635) 8(2.45,1.905)
  silkscreen extent -2.57,-2.5 0.8,2.93, body extent -2,-2.5 2,2.5, height 1.75
USB-MICRO-B_V [mm] "USB, MICRO B, Body 7.491x4.695 mm, Pitch 0.65 mm"
  rect 0.4x1.35 smd: 1(-1.3,1.35) 2(-0.65,1.35) 3(0,1.35) 4(0.65,1.35) 5(1.3,1.35)
  round 1.45 hole 0.85: 6(-2.5,1.35) 7(2.5,1.35)
  rrect50% 0x0 hole 0.6 slot 1.3 at 90 deg: 8(-3.5,-1.35) 11(3.5,-1.35)
  rect 1.5x1.9 smd: 9(-1,-1.35) 10(1,-1.35)
  Top Layer circle w0.5: c-3.6,-1.8 r0.25
  Top Layer circle w0.5: c-3.6,-0.9 r0.25
  Top Layer region: -3.6,-1.8 -3.6,-0.9 -4.1,-0.9 -4.1,-1.8
  Top Layer region: 3.6,-0.9 3.6,-1.8 4.1,-1.8 4.1,-0.9
  Top Layer region: 2.3,-0.4 2.3,-2.3 3.6,-2.3 3.6,-0.4
  Top Layer region: -2.3,-2.3 -2.3,-0.4 -3.6,-0.4 -3.6,-2.3
  Top Layer lines w0.5: 3.805,-1.657 ccw(c3.6,-1.8) 3.6,-1.55 ccw(c3.6,-1.8) 3.395,-1.657 ccw(c3.6,-1.8) 3.805,-1.657 ; 3.508,-1.132 ccw(c3.6,-0.9) 3.6,-0.65 ccw(c3.6,-0.9) 3.367,-0.991 ccw(c3.6,-0.9) 3.368,-0.992 ccw(c3.6,-0.9) 3.508,-1.132
  silkscreen extent -3.75,-3.5 3.75,2.7, body extent -4.1,-3.9 4.1,1.5, height 2.67

## Part data
BT1: "Multicell Battery", LatestRevisionDate=17-Jul-2002, LatestRevisionNote="Re-released for DXP Platform.", PackageDescription="Battery; 2 Leads", PackageReference=BAT-2, Published=24-Mar-1999, Publisher="Altium Limited"
C1 C2: library part CMP-1035-02796-1, "CAP 10uF 6.3V ±10% 0603 (1608 Metric) Thickness 1mm SMD", Case-EIA=0603, Case-Metric=1608, Rated Voltage="6.3 V", Tolerance=Â±10%, Max Thickness="1 mm", Technology=SMT
C3 C4 C6 C7: library part CMP-1035-02576-1, "CAP 100nF 6.3V ±10% 0603 (1608 Metric) Thickness 1mm SMD", Case-EIA=0603, Case-Metric=1608, Rated Voltage="6.3 V", Tolerance=Â±10%, Max Thickness="1 mm", Technology=SMT
C8: library part CMP-1035-02503-1, "CAP 47nF 16V ±10% 0603 (1608 Metric) Thickness 1mm SMD", Case-EIA=0603, Case-Metric=1608, Rated Voltage="16 V", Tolerance=Â±10%, Max Thickness="1 mm", Technology=SMT
C9 C11: library part CMP-1035-02799-1, "CAP 10uF 10V ±10% 0603 (1608 Metric) Thickness 1mm SMD", Case-EIA=0603, Case-Metric=1608, Rated Voltage="10 V", Tolerance=Â±10%, Max Thickness="1 mm", Technology=SMT
C10: library part CMP-1035-02588-1, "CAP 100nF 25V ±10% 0603 (1608 Metric) Thickness 1mm SMD", Case-EIA=0603, Case-Metric=1608, Rated Voltage="25 V", Tolerance=Â±10%, Max Thickness="1 mm", Technology=SMT
C12: library part CMP-1035-02786-1, "CAP 4.7uF 10V ±20% 0603 (1608 Metric) Thickness 0.55mm SMD", Case-EIA=0603, Case-Metric=1608, Rated Voltage="10 V", Tolerance=Â±20%, Max Thickness="0.55 mm", Technology=SMT
C13: library part CMP-1661-00004-1, "Standard Tantalum, 10 uF, +/- 10%, 16 V, -55 to 125 degC, 2-Pin SMD (1206), RoHS, Tape and Reel", Case\Package=SOT-26, Frequency="300 MHz", Max Operating Temperature="150 degC", Max Power Dissipation="300 mW", Min Operating Temperature="-55 degC", Package Quantity=3000, ComponentLink1Description="Manufacturer URL", ComponentLink1URL=http://www.avx.com/, ComponentLink2Description=Datasheet, ComponentLink2URL=http://datasheets.avx.com/TAJ.pdf, ComponentLink3Description="Package Specification", ComponentLink3URL=http://www.avx.com/download/software/literature/AVX-Footprint-Library.pdf, DatasheetVersion=Feb-16, Elements=2, Height="1.3 mm", hFE Min=60, Length="3.1 mm", Mount="Surface Mount", PackageDescription="2-Pin Surface Mount Device, Body 3.2 x 1.65 mm", PackageReference=CAPMP3217X18-T, Packaging="Tape and Reel", Pins=6, Radiation Hardening=No, REACH SVHC="No SVHC", RoHSCompliant=true, Vce Max="500 mV", Width="1.7 mm"
C14: library part CMP-2000-05173-1, "Capacitor, Tantalum, 10 uF, +/- 10%, 16 V, -55 to 125 degC, 2-Pin SMD (1206), RoHS, Tape and Reel", Capacitance=10uF, Case Code=A, Case Style=Molded, Manufacturer=Kemet, Operating Temp Range=-55Cto125C, Package / Case=3216-18, Package Description="2-Pin Surface Mount Device, Body 3.2 x 1.6 mm", Package Reference=1206, Tolerance (+ or -)=10%, Voltage=16VDC, Construction=SMTChip, Datasheet URL=http://www.farnell.com/datasheets/1824869.pdf, Datasheet Version=Apr-14, DCL=1.6uA, DF=8%, ESR=7ohm, Failure Rate=NotRequired, Insulation=NotRequired, Lead Spacing (nom)=NotRequiredmm, Length W/Weld=NotRequiredmm, Manufacturer URL=http://www.kemet.com/, Mounting Style=SurfaceMount, Packaging=TapeandReel, Polarity=Polar, Product Depth (mm)=1.6mm, Product Diameter (mm)=NotRequiredmm, Product Height (mm)=1.6mm, Product Length (mm)=3.2mm, Seal=NotRequired, Seated Plane Height=NotRequiredmm, Wire Form=NotRequired
C15 C19 C24: library part CMP-1035-02575-1, "CAP 100nF 6.3V ±5% 0603 (1608 Metric) Thickness 1mm SMD", Case-EIA=0603, Case-Metric=1608, Rated Voltage="6.3 V", Tolerance=Â±5%, Max Thickness="1 mm", Technology=SMT
C16 C20: library part CMP-1035-02782-1, "CAP 4.7uF 6.3V ±20% 0603 (1608 Metric) Thickness 1mm SMD", Case-EIA=0603, Case-Metric=1608, Rated Voltage="6.3 V", Tolerance=Â±20%, Max Thickness="1 mm", Technology=SMT
C17 C21: library part CMP-1035-02741-1, "CAP 1uF 25V ±20% 0603 (1608 Metric) Thickness 1mm SMD", Case-EIA=0603, Case-Metric=1608, Rated Voltage="25 V", Tolerance=Â±20%, Max Thickness="1 mm", Technology=SMT
C22: library part CMP-1035-02697-1, "CAP 470nF 10V ±20% 0603 (1608 Metric) Thickness 1mm SMD", Case-EIA=0603, Case-Metric=1608, Rated Voltage="10 V", Tolerance=Â±20%, Max Thickness="1 mm", Technology=SMT
C23: library part CMP-1035-02733-1, "CAP 1uF 10V ±10% 0603 (1608 Metric) Thickness 1mm SMD", Case-EIA=0603, Case-Metric=1608, Rated Voltage="10 V", Tolerance=Â±10%, Max Thickness="1 mm", Technology=SMT
D1: library part LED-RG-KAAK-4, "LED Indicator, Red / Green, 2 V, -40 to 100 degC, 4-Pin SMD, RoHS, Tape and Reel", Emitting Color=YellowGreen/Red, Forward Current=30mA, Forward Voltage=2.6V, Manufacturer=Dialight, Operating Temperature Classification=Industrial, Operating Temp Range=-55Cto100C, Package Description="4-Pin Surface Mount Device, Body 4.32 x 8.77 mm, Pitch 1.5 mm", Package Reference=591-3001-013F, Package Type=SMD, Power Dissipation=100W, Reverse Voltage=5V, Test Current (It)=20mA, Datasheet URL=https://datasheet.ciiva.com/2132/c17245-2132277.pdf, Datasheet Version="Rev. B, 10/2010", DELETED=Compliant, Dominant Wave Length=570/628nm, High Brightness=No, Lens Dimensions=2.8x2.8x2.7mm, Lens Type=NonDiffused, Luminous Intensity=8/6.5mcd, Lum Intensity=8/6.5mcd, Main Category=ChipLED, Manufacturer URL=http://www.dialight.com/, Mounting=SurfaceMount, Mounting Technology=SurfaceMount, Number of  Elements=2, Packaging=TapeandReel, Pin Count=2, Product Depth (mm)=8.8mm, Product Height (mm)=5mm, Product Length (mm)=4.3mm, Rad Hardened=No, Shape Type=Circular, Type=Bi-Color, Viewing Angle=40deg
D2: library part CMP-2000-05191-1, "TVS Diode Array, 30 pF, 30 KV, -40 to 85 degC, 4-Pin SOT143, RoHS, Tape and Reel", Capacitance Value=30pF, Clamping Voltage=8V, Leakage Current=0.1uA, Manufacturer=Littelfuse, Operating Temperature Classification=Industrial, Operating Temperature Max Deg. C=85C, Operating Temperature Min Deg. C=-40C, Operating Temp Range=-40Cto85C, Package / Case=SOT-143, Reverse Stand-off Voltage=5.5(Min)V, Working Voltage=5.5V, Working Voltage (Max)=5.5V(Min), Clamping Voltage (Max)=8V, Configuration=Triple, Datasheet URL=https://datasheet.ciiva.com/15143/getdatasheetpartid-116020-15143550.pdf, Datasheet Version=Dec-13, Direction Type=Uni-Directional, Leakage Current (Max)=0.1uA, Manufacturer URL=http://www.littelfuse.com/, Mounting=SurfaceMount, Mounting Style=SurfaceMount, Number of Elements=3, Package Type=SOT-143, Packaging=TapeandReel, Pin Count=3+Tab, Polarity=Uni-Directional, Product Depth (mm)=1.4mm, Product Height (mm)=1.05mm, Product Length (mm)=3.04mm, Rad Hardened=No, Suppressor Type=TVS
FB1: library part CMP-0686-00574-2, "Chip Ferrite Bead for Power Lines, 60 Ohm, 500 mA, -55 to 125 degC, 1.6 x 0.8 x 0.95 mm SMD, Tape and Reel", DC Resistance="0.10 Ohm Max.", Manufacturer=Murata, Operating Temperature Range="-55 to 125 degC", Rated Current="500 mA", ComponentLink1Description="Manufacturer URL", ComponentLink1URL=http://www.murata.com/, ComponentLink2Description=Datasheet, ComponentLink2URL=http://www.murata.com/products/catalog/pdf/c31e.pdf, ComponentLink3Description="Package Specification", ComponentLink3URL=http://www.murata.com/products/catalog/pdf/c31e.pdf, DatasheetVersion=08/2013, Impedance (at 100 MHz)="60 Ohm Typ.", Mounting Technology="Surface Mount", PackageDescription="2-Pin Chip, Body 1.6 x 0.8 mm", PackageReference=BLM18_H950-2, Packing="Tape and Reel", PartNumber=BLM18PG600SN1J
J1 J3 J4: "Header, 6-Pin", LatestRevisionDate=17-Jul-2002, LatestRevisionNote="Re-released for DXP Platform.", Publisher="Altium Limited"
J2: library part CMP-2000-05827-1, "Micro-USB B Receptacle, Right Angle, Bottom Mount, Surface Mount, with Solder Tabs, -30 to 85 degC, 5-Pin USB, RoHS, Tape and Reel", Manufacturer=Molex, Package Description="5-Leads USB, Micro B, Body 7.5 x 5 mm, Pitch 0.65 mm", Package Reference=MICRO-B, Package Version="Rev. F, 12/2012", Standard Package=1, Voltage - Max=30V, 3D Model=105017-0001.stp, Catalog Drawings=1050170001, Category=Connectors,Interconnects, Circuits=5, Connector Type=USB-microB, Datasheet URL=http://www.molex.com/elqNow/elqRedir.htm?ref=http://www.molex.com/webdocs/datasheets/pdf/en-us/1050170001_IO_CONNECTORS.pdf, Datasheet Version=03/2016, Family=USB,DVI,HDMIConnectors, Featured Product=Micro-USBConnectorsUSBConnectors, Features=Shielded,SolderRetention, Gender=Receptacle, Ingress Protection=-, Manufacturer URL=http://www.molex.com/, Mating Products=WM17145-ND-CABLEMICROUSBBTOSTDA1.0MWM17147-ND-CABLEMICROUSBBTOSTDA2.0MWM17146-ND-CABLEMICROUSBBTOSTDA1.5M, Mounting Technology=SurfaceMount, Mounting Type=BoardCutout,SurfaceMount,RightAngle, Number of Contacts=5, Online Catalog=Molex-MicroUSB, Other Names=WM1399DKR, Package URL=http://www.molex.com/pdm_docs/sd/1050170001_sd.pdf, Packaging=Digi-Reel®, PCN Assembly/Origin=ResinSupplier21/Oct/2015, RoHS Information=1050170001CertofCompliance, Series=-, Specifications=-
L1: library part CMP-05439-000009-1, "FIXED IND 2.2UH 5.8A 24.8 MOHM", Inductance=2.2uH, Manufacturer=Panasonic, Package=PCC-M0530M, Rms Current=4.8A, Saturation Current=10.9A, Series Resistance=24.8mΩ, Temperature="-40°C to +150°C", Temperature Range High=+150°C, Temperature Range Low=-40°C, Test Frequency=100kHz, Tolerance=20%, Automotive=Yes, Automotive Grade="Grade 0", Category=Ind, ComponentLink2Description=Datasheet, ComponentLink2URL=https://industrial.panasonic.com/cdbs/www-data/pdf/AGL0000/AGL0000C59.pdf, Core Material="Metal Composite", Device Class L1="Passive Components", Device Class L2=Inductors, Device Class L3="Fixed Inductors", Digikey Description="FIXED IND 2.2UH 5.8A 24.8 MOHM", Height=3mm, Lead Free=Yes, Manufacturer Part Number=ETQ-P3M2R2YFP, Octopart=https://octopart.com/etqp3m2r2yfp-panasonic-65686337, RoHS=TRUE, Shielding=true, Standoff Height=0.05mm
LED1 LED2 LED3 LED4: library part CMP-1426-00003-1, "SMD mono-color Chip LED, WL-SMCW, Blue", Color=Blue, Manufacturer="Wuerth Elektronik", ComponentLink1Description="Manufacturer URL", ComponentLink1URL=http://www.we-online.com, ComponentLink2Description=Datasheet, ComponentLink2URL=http://katalog.we-online.com/led/datasheet/150060BS75000.pdf, PackageReference=0603_A, PartNumber=150060BS75000
M1: library part CC1310-MOD
MOD1: library part TA3235S_MOD, "TA3235S Dual Band Wifi MOD"
P1: "Header, 20-Pin, Dual row", LatestRevisionDate=17-Jul-2002, LatestRevisionNote="Re-released for DXP Platform.", Publisher="Altium Limited"
R1 R19 R22 R30 R32: library part CMP-1012-00623-1, "10K 0.1W 1% 0603 (1608 Metric)  SMD", Case-EIA=0603, Case-Metric=1608, Power="0.1 W", Tolerance="1 %", Technology=SMT
R2: library part CMP-1011-00074-1, "1K 0.063W 5% 0402 (1005 Metric)  SMD", Case-EIA=0402, Case-Metric=1005, Power="0.063 W", Tolerance="5 %", Technology=SMT
R3: library part CMP-1012-00779-1, "249K 0.1W 1% 0603 (1608 Metric)  SMD", Case-EIA=0603, Case-Metric=1608, Power="0.1 W", Tolerance="1 %", Technology=SMT
R4 R5 R6 R7 R13 R20 R21: library part CMP-1012-00510-1, "1K 0.1W 1% 0603 (1608 Metric)  SMD", Case-EIA=0603, Case-Metric=1608, Power="0.1 W", Tolerance="1 %", Technology=SMT
R8 R15 R16 R18: library part CMP-1012-00625-1, "10K5 0.1W 1% 0603 (1608 Metric)  SMD", Case-EIA=0603, Case-Metric=1608, Power="0.1 W", Tolerance="1 %", Technology=SMT
R11 R14: library part CMP-1012-00586-1, "4K7 0.1W 1% 0603 (1608 Metric)  SMD", Case-EIA=0603, Case-Metric=1608, Power="0.1 W", Tolerance="1 %", Technology=SMT
R23 R24: library part CMP-1012-00001-1, "Jumper 0603 (1608 Metric)", Case-EIA=0603, Case-Metric=1608, Power=None, Technology=SMT, Tolerance=None
R25 R26 R27 R28: library part CMP-1012-00397-1, "100R 0.1W 1% 0603 (1608 Metric)  SMD", Case-EIA=0603, Case-Metric=1608, Power="0.1 W", Tolerance="1 %", Technology=SMT
R31: library part CMP-2003-04373-2, "RES 0.01 OHM 1% 1W 1206", Case/Package=1206, Case Code (Metric)=3216, Max Operating Temperature=170°C, Max Power Dissipation=1W, Min Operating Temperature=-65°C, Package Quantity=1, Resistance=10mR, Resistance Tolerance=1%, Resistor Type="Metal Strip", Temperature Coefficient=75ppm/°C, Case Code (Imperial)=1206, Construction=Rectangular, Contact Plating=Tin, Depth=1.6mm, Features="Moisture Resistant", Height=0.035inch, Lead Free="Lead Free", Length=3.2mm, Military Standard=Not, Mount="Surface Mount", Number of Pins=2, Number of Terminations=2, Packaging="Tape and Reel", Power Rating=1W, Radiation Hardening=No, RoHS Compliant=Yes, Series=WSLP, Size Code=1206, Termination=SMD/SMT, Tolerance=1%, Weight=0.000571oz, Width=0.063inch
RF1: library part TG-RECE-20369-001E-01-4, "RF Connector, Onboard Receptacle, IPEX MHFIII", Housing Color=Gold, Manufacturer=Taoglas, ComponentLink1Description="Manufacturer URL", ComponentLink1URL=http://www.taoglas.com/, ComponentLink2Description=Datasheet, ComponentLink2URL=http://www.taoglas.com/images/product_images/original_images/RECE.20369.001E.01.pdf, ComponentLink3Description="Package Specification", ComponentLink3URL=http://www.taoglas.com/images/product_images/original_images/RECE.20369.001E.01.pdf, DatasheetVersion="Rev. C", Mounting Technology="Surface Mount", PackageDescription="4-Pin, Hand Drawn, Body 1.7x1.7mm", PackageReference=RECE-20369-001E-01-4, PackageVersion="Rev. C", Packing="Tape and Reel", PartNumber=RECE-20369-001E-01
SW1 SW2: library part CMP-05618-000102-1, "SWITCH TACTILE SPST-NO 0.05A 12V", Actuator Color=Black, Contact Current Rating=50mA, Contact Resistance=500mR, Max Operating Temperature=70°C, Max Voltage Rating (DC)=12V, Min Operating Temperature=-20°C, Operating Force=2.2N, Package Quantity=1, Actuator Length=0.65mm, Current Rating=50mA, Depth=3.55mm, Electrical Life=100000Cycles, Illumination Type=Non-Illuminated, Lead Free="Lead Free", Length=4.3mm, Max Current Rating=50mA, Mechanical Life=100000Cycles, Mount="Surface Mount", Orientation="Right Angle", Packaging="Tape and Reel", Radiation Hardening=No, REACH SVHC="No SVHC", Series=EVQP7, Size=2.9mm, Switch Function=Off-Mom, Switch Travel=0.2mm, Termination=J-Bend, Throw Configuration=SPST, Voltage Rating (DC)=12V
U1: library part CMP-0859-00115-3, "Single 2-Input Positive-OR Gate, DBV0005A, LARGE T&R", F @ Nom Voltage(Max)(Mhz)=75, Generic Part Number=SN74AHC1G32, ICC @ Nom Voltage(Max)(mA)=0.01, Manufacturer="Texas Instruments", Operating Temperature Range(C)="-40 to 125", Rating=Catalog, tpd @ Nom Voltage(Max)(ns)=13,8.5, Voltage(Nom)(V)=3.3,5, 3-State Output=No, Bits(#)=1, DatasheetVersion=SCLS317O, Gate Type=OR, Input Type=CMOS, Logic=True, Output Drive (IOL/IOH)(Max)(mA)=50/-50, Output Type=CMOS, PackageReference=DBV0005A, Schmitt Trigger=No, Sub-Family="OR Gate", Technology Family=AHC, VCC(Max)(V)=5.5, VCC(Min)(V)=2
U2: library part CMP-0395-00117-1, "Single Output Fast Transient Response LDO, 1 A, Fixed 3.3 V Output, 2.7 to 10 V Input, with Low IQ, 8-pin SOIC (D), -40 to 125 degC, Green (RoHS & no Sb/Br)", Manufacturer="Texas Instruments", Power Good=TRUE, Accuracy(%)=2, Code_JEDEC=MS-012, ComponentLink1Description="Manufacturer URL", ComponentLink1URL=http://www.ti.com/, ComponentLink2Description=Datasheet, ComponentLink2URL=http://www.ti.com/general/docs/lit/getliterature.tsp?genericPartNumber=TPS76833&fileType=pdf, ComponentLink3Description="Package Specification", ComponentLink3URL=http://www.ti.com/litv/pdf/msoi002j, DatasheetVersion=SLVS211L, Eco-Plan="Green (RoHS & no Sb/Br)", Fixed Output Options(V)=3.3, Iout(Max)(A)=1, Iq(Typ)(mA)=0.08, Mounting Technology="Surface Mount", PackageDescription="8-Pin Plastic Small Outline, Body 4.9 x 3.9 mm, Pitch 1.27 mm", PackageReference=D8, PackageVersion=4040047-3/M, PartNumber=TPS76833QDG4, SubFamily="Single Channel LDO", Vdo(Typ)(mV)=350, Vin(Max)(V)=10, Vin(Min)(V)=2.7, Vout Adj(Max)(V)=3.3, Vout Adj(Min)(V)=3.3
U3: "Imported", Alternate_PartNumber=BQ25895RTWT, Manufacturer="Texas Instruments", CompType=IC, MountType=SMT, PackageReference=RTW0024H, PartNumber=BQ25895RTWR, PIN_COUNT=25, RefDes=RefDes, Type=TYPE
U4: library part SLAB-CP2102N-QFN-24, "USBXpress(TM) Family, 4 GPIOs, 2.2 to 3.6 V, -40 to 85 degC, 24-Pin QFN, RoHS", Case\/Package=QFN, Manufacturer="Silicon Labs", Max Operating Temperature=85degC, Max Supply Voltage=3.6V, Min Operating Temperature=-40degC, Min Supply Voltage=3V, Package Description="24-Pin Quad Flat No-lead Package, Body 4 x 4 mm, Pitch 0.5 mm", Package Reference=QFN-24-2550x2550TP_A, Datasheet URL=http://www.silabs.com/documents/public/data-sheets/cp2102n-datasheet.pdf, Datasheet Version="Rev. 1.1, 08/2016", Manufacturer URL=http://www.silabs.com/, Mounting Technology=SurfaceMount, Number of Pins=24, REACH SVHC=Unknown, RoHSCompliant=False
U6: library part 0f562f18464a1f07b55dcd927f1fdf2, "IC BATT FUEL GAUGE LI-ION 12SON", Ambient Temperature Range High=+85°C, Ambient Temperature Range Low=-40°C, Manufacturer="Texas Instruments", Max Supply Voltage=4.5V, Min Supply Voltage=2.45V, Nominal Supply Current=93uA, Output Voltage=1.8V, Package=DRZ0012A, Temperature="-40°C to +85°C", Automotive=No, Category=IC, ComponentLink2Description=Datasheet, ComponentLink2URL=http://www.ti.com/lit/gpn/bq27441-g1, Device Class L1="Integrated Circuits (ICs)", Device Class L2="Power Management ICs", Device Class L3="Battery Management", Digikey Description="IC BATT FUEL GAUGE LI-ION 12SON", Height=1mm, Lead Free=Yes, Manufacturer Part Number=BQ27441DRZR-G1A, Mouser Description="System-Side Impedance Track? Battery Fuel (Gas) Gauge 12-SON -40 to 85", Number Of Cells=1, Number Of Outputs=1, Octopart=https://octopart.com/bq27441drzr-g1a-texas+instruments-30555829, RoHS=TRUE, Standoff Height=0mm, Temperature Range High=+85°C, Temperature Range Low=-40°C
U7: library part CMP-04892-000009-1, "IC USB SW/MHL DPDT 10UQFN", Ambient Temperature Range High=+85°C, Ambient Temperature Range Low=-40°C, Manufacturer="Texas Instruments", Max Supply Voltage=4.8V, Min Supply Voltage=2.3V, Nominal Supply Current=30uA, On State Resistance=5.7Ω, Package=UQFN10, Temperature="-40°C to +85°C", -3Db Bandwith=6.1GHz, Automotive=No, Category=IC, ComponentLink2Description=Datasheet, ComponentLink2URL=http://www.ti.com/lit/ds/symlink/ts3usb3000.pdf, Device Class L1="Integrated Circuits (ICs)", Device Class L2="Interface ICs", Device Class L3="Analog Switches", Digikey Description="IC USB SW/MHL DPDT 10UQFN", Height=0.6mm, Interface=USB, Ipc Land Pattern Name=QFN50P150X200X55-10, Lead Free=Yes, Manufacturer Part Number=TS3USB3000RSER, Mouser Description="DPDT USB 2.0 High-Speed and Mobile High-Definition Link (MHL) (6.1GHz) Switch 10-UQFN -40 to 85", Number Of Circuits=2, Octopart=https://octopart.com/ts3usb3000rser-texas+instruments-25746917, RoHS=TRUE, Standoff Height=0mm, Temperature Range High=+85°C, Temperature Range Low=-40°C, Throw Configuration=DPDT

## Via types
v1: diameter 21.65, hole 11.81, Top Layer to Bottom Layer, tented both sides, 182 vias
v2: diameter 157.48, hole 78.74, Top Layer to Bottom Layer, 3 vias
v3: diameter 78.74, hole 59.06, Top Layer to Bottom Layer, tented both sides, 1 vias
v4: diameter 59.06, hole 51.18, Top Layer to Bottom Layer, tented both sides, 1 vias
v5: diameter 47.24, hole 35.43, Top Layer to Bottom Layer, tented both sides, 1 vias

## Nets (pads, with @x,y where several pads share a name; then routed paths per layer and width w, separated by ;. In a path a pad name is that pad's centre, name@x,y a point inside that pad or via, vN(x,y) a via of type N, cw(c..) or ccw(c..) an arc to the next point about the centre after c; other vN are vias at no path point)
3.3VD: C2.2 C3.2 C4.2 C6.2 C7.2 C10.2 J1.6 J4.6 M1.12 MOD1.15 MOD1.16 P1.2 P1.4 R1.1 R3.2 R6.2 R11.1 R13.1 R14.1 R20.2 R21.1 R22.2 R30.2 SW2.2' U1.5 U2.5 U2.6 | length 715.4
  Top Layer w8: R6.2@46.63,666.56 44.67,666.56 45.94,667.83 46.58,667.19 v1(82.31,667.19)
  Top Layer w10: C4.2@648.46,449.08 C4.2@650.17,447.36 ; C7.2@2353.74,1538.92 2357.4,1535.26 v1(2357.4,1507.42) 2359.63,1505.19 2369.96,1505.19 2390.72,1484.43 J1.6@2406.28,1484.43
  Top Layer w14: R13.1@50.84,315.88 51.2,315.52 51.2,280.43 v1(51.56,280.07) ; R21.1@51.34,172.97 51.45,172.86 51.45,136.72 v1(51.56,136.61) ; U1.5@569.68,421.77 U1.5@573.62,421.77 622.61,421.77 648.46,447.61 C4.2@648.46,449.08 ; v1(1946.54,431.26) R30.2@1946.54,459.7
  Top Layer w15: R14.1@838.67,984.37 840.64,984.37 888.7,936.3 894.59,936.3 v1@895.7,935.19 ; R11.1@895.53,1015.86 895.7,1015.7 v1@895.7,935.19 ; v1(895.86,935.03) v1@895.7,935.19
  Top Layer w16: C6.2@2104.1,252.67 C6.2@2113.41,243.35 ; M1.12@2104.1,324.5 2104.67,325.07 v1(2104.67,391.91)
  Top Layer w20: J4.6@919.03,190.54 v1(919.03,235.96) ; C6.2@2104.1,252.67 M1.12@2104.1,324.5 ; R22.2@2354.81,1770.43 v1(2354.81,1800.97) ; R20.2@2439.24,1982.64 R20.2@2440.84,1981.04
  other v1: 411.56,244.29 447.07,244.29 650.17,465.03 796,798.54 796,835.03 829,835.03 1908.86,1108.47 1908.86,1137.98 1069.52,1858.78 2439.24,1962.96 2559.14,2007.48
BATT_Gau_OUT: C14.1 R31.2 U3.13 U3.14 U6.7 | length 359.8
  Top Layer w8: C14.1@645.2,1588.99 656.44,1577.74 v1(767.5,1577.74) ; v1(792.19,1605.46) 792.19,1642.37 846.66,1696.84 R31.2@857.43,1696.84 857.43,1706.47 905.16,1754.2 U6.7@905.16,1785.18
  other v1: 767.5,1203.15 796.52,1203.15 767.5,1237.54 796.52,1237.54 792.19,1577.74 767.5,1605.46
BATT_IN: BT1.1 C23.2 R31.1 U6.6 U6.8 | length 760.8
  Top Layer w8: v1(712.66,1737.84) 712.66,1785.55 786.16,1859.05 786.16,1898.03 C23.2@827.36,1939.23 827.36,1960.4 838.19,1971.23 891.71,1971.23 905.16,1957.78 U6.6@905.16,1941.11 ; U6.8@920.91,1785.18 920.91,1752.79 967.24,1706.47 R31.1@967.24,1696.84
  Power Layer 1 w8: v1(713.03,1701.04) 724.92,1712.92 v1(986.79,1712.92)
  other v1: 987.28,1674.95 1009.2,1675.12 676.48,1701.84 1009.2,1712.49 676.48,1737.25